# Altium PCB COMM_V3.PcbDoc (part 2 of 5)
Units mm, origin at the board's own origin, x right, y up, seen from the top; angles counter-clockwise.
Board outline 93 x 90 mm, 6 copper layers (Top Layer, L2_GND, L3_PWR, L4_SIG, L5_GND, Bottom Layer), stack 1.634 mm thick; 271 components, 237 nets, 1362 pads, 1090 vias.
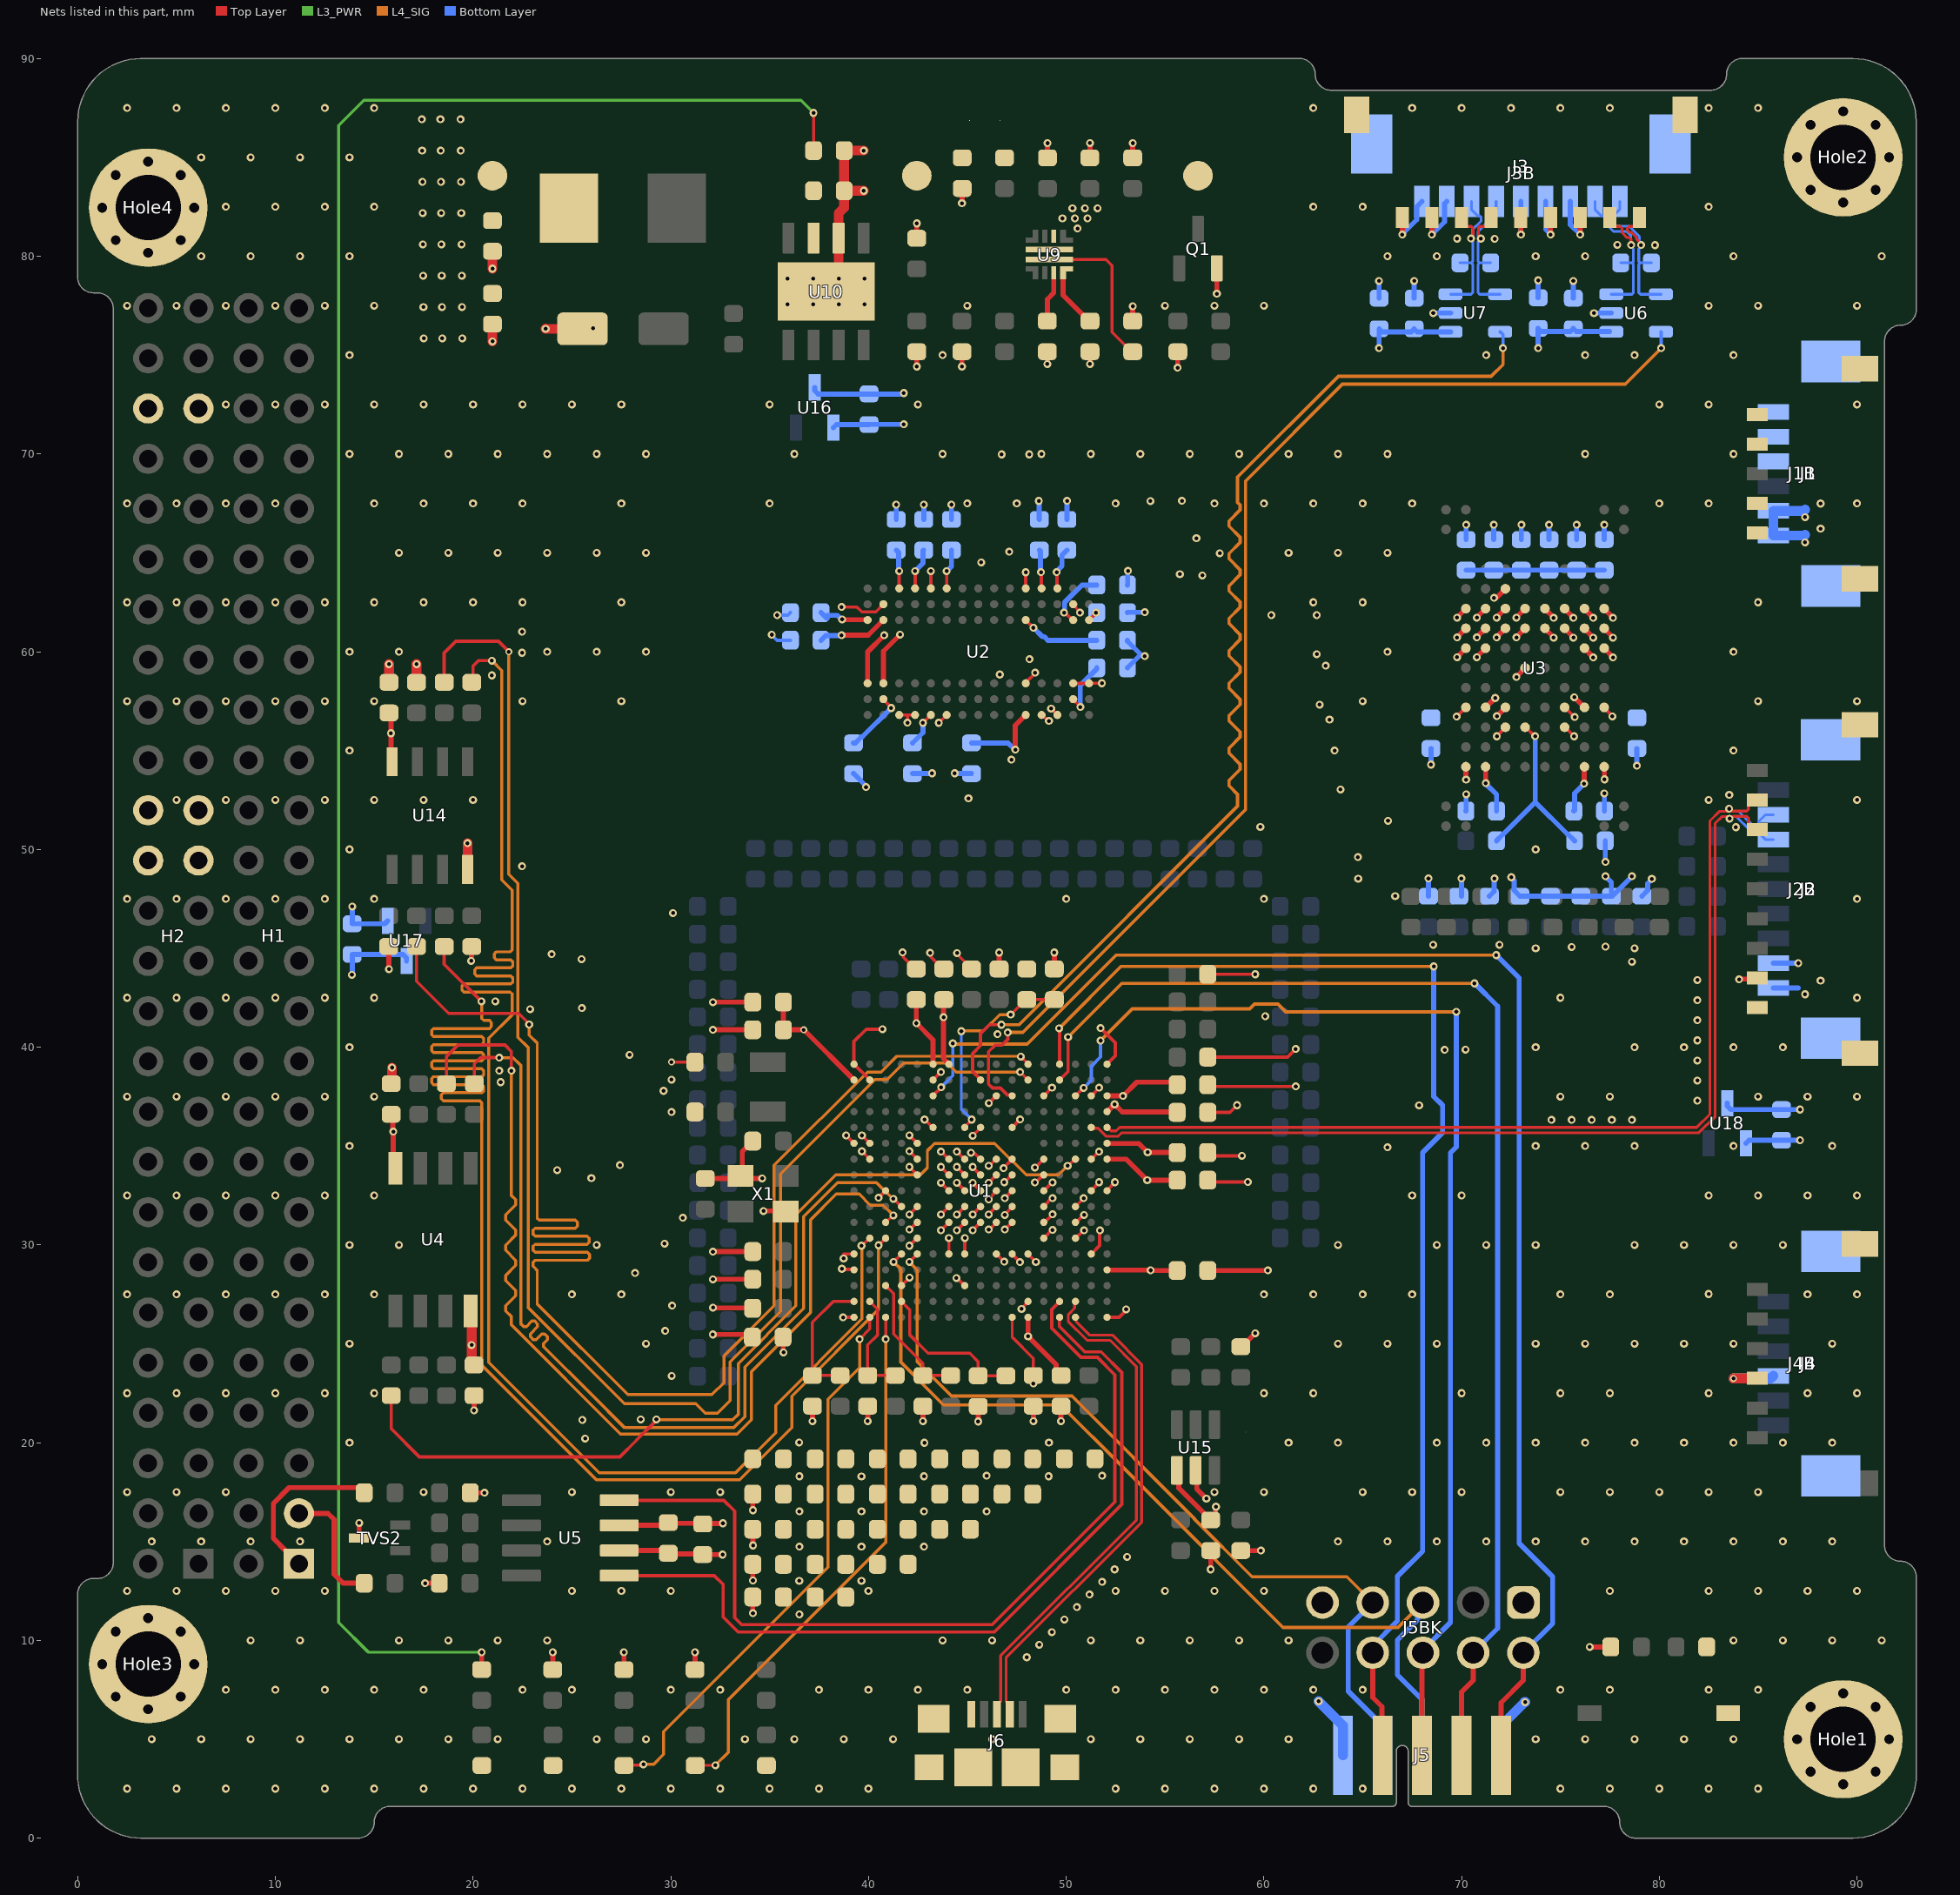
[diagram p6: the nets of this part, all layers, seen from the top]

## Via types
v1: diameter 0.4, hole 0.2, Top Layer to Bottom Layer, tented both sides, 1084 vias
v2: diameter 0.35, hole 0.2, Top Layer to Bottom Layer, tented both sides, 6 vias

## Nets (pads, with @x,y where several pads share a name; then routed paths per layer and width w, separated by ;. In a path a pad name is that pad's centre, name@x,y a point inside that pad or via, vN(x,y) a via of type N, cw(c..) or ccw(c..) an arc to the next point about the centre after c; other vN are vias at no path point)
3V3: C1.2 C2.2 C3.2 C4.2 C5.2 C6.2 C7.2 C8.2 C9.2 C10.2 C11.2 C12.2 C13.2 C14.2 C15.2 C16.2 C17.2 C18.2 C19.2 C20.2 C27.2 C28.2 C29.2 C30.2 C31.2 C32.2 C33.1 C34.1 C36.2 C37.2 C38.2 C39.2 C47.1 C49.2 C50.2 C58.2 C59.2 C60.2 C61.2 C62.2 C63.2 C64.2 C65.2 C66.2 C67.2 C68.2 C69.2 C70.1 C71.2 C72.2 C73.2 C74.2 C75.2 C76.2 C77.2 C78.2 C79.2 C80.2 C88.1 C89.1 C90.2 C91.2 C92.1 C95.2 C96.2 C97.2 C99.2 C101.2 FB2.1 J5.10 J5BK.1 L1.2 R1.2 R2.2 R3.2 R4.2 R5.2 R6.2 R7.2 R8.2 R17.2 R18.2 R22.2 R79.1 R80.1 R82.1 R84.1 R87.1 R117.2 R118.2 R121.2 R127.1 R151.2 R152.2 R153.2 TP13.1 U1.A6 U1.B1 U1.C17 U1.E6 U1.E9 U1.E11 U1.F5 U1.F17 U1.G5 U1.G13 U1.G17 U1.H5 U1.H13 U1.J13 U1.K5 U1.K13 U1.L5 U1.L13 U1.M5 U1.M13 U1.N7 U1.N8 U1.N10 U1.N11 U1.N12 U1.P17 U1.U12 U2.A7 U2.B2 U2.B7 U2.C9 U2.D9 U2.E1 U2.F9 U2.L1 U2.L7 U2.M9 U2.N9 U2.P2 U2.P7 U2.R7 U3.E4@72.215,63.181 U3.F2@70.215,62.181 U3.F3@71.215,62.181 U3.F4@72.215,62.181 U3.F5@73.215,62.181 U3.F6@74.215,62.181 U3.F7@75.215,62.181 U3.F8@76.215,62.181 U3.F9@77.215,62.181 U3.H3@71.215,60.181 U3.H8@76.215,60.181 U3.L2@70.215,57.181 U3.L4@72.215,57.181 U3.L7@75.215,57.181 U3.L9@77.215,57.181 U3.P3@71.215,54.181 U3.P8@76.215,54.181 U4.8 U5.3 U6.1 U7.1 U14.8 U15.1 U16.1 U17.1 U18.1 | length 171.7
  Top Layer w0.152: v1(45.269,35.518) 45.269,35.529 45.669,35.929 U1.E9@45.669,35.939
  Top Layer w0.169: U2.B2@40.757,57.601 40.757,57.571 41.148,57.18 v1(41.148,57.15) ; U2.C9@41.557,63.201 v1(41.557,64.073) ; v1(42.069,29.959) 42.079,29.959 42.459,30.339 U1.M5@42.469,30.339 ; v1(42.069,30.776) 42.088,30.776 42.451,31.139 U1.L5@42.469,31.139 ; v1(42.069,31.539) U1.K5@42.469,31.939 ; v1(42.069,33.939) U1.H5@42.469,33.539 ; v1(42.069,34.739) U1.G5@42.469,34.339 ; v1(42.069,35.539) U1.F5@42.469,35.139 ; U2.D9@42.357,63.201 v1(42.357,64.073) ; v1@42.757,56.402 U2.E1@43.157,56.801 ; v1(42.838,36.339) 42.853,36.339 43.253,35.939 U1.E6@43.269,35.939 ; U2.F9@43.957,63.201 v1(43.957,64.073) ; U1.N7@44.069,29.539 v1(44.069,30.345) ; U1.N8@44.869,29.539 v1@44.869,30.345 ; U1.N10@46.469,29.539 46.474,29.539 46.861,29.152 v1(46.865,29.152) ; U1.N11@47.269,29.539 47.269,29.528 47.663,29.135 v1(47.663,29.124) ; U1.E11@47.269,35.939 v1(47.674,36.343) ; U2.L7@47.957,61.601 47.957,61.599 48.343,61.213 v1(48.343,61.21) ; U1.N12@48.069,29.539 v1(48.469,29.139) ; v1(48.419,33.158) 48.454,33.158 48.834,33.539 U1.H13@48.869,33.539 ; v1(48.419,33.914) 48.431,33.914 48.857,34.339 U1.G13@48.869,34.339 ; v1(48.729,64.02) 48.743,64.007 48.743,63.215 U2.M9@48.757,63.201 ; U1.M13@48.869,30.339 49.286,30.756 v1(49.308,30.756) ; U1.L13@48.869,31.139 48.903,31.139 v1(49.308,31.544) ; U1.K13@48.869,31.939 48.869,31.956 49.255,32.343 v1@49.255,32.36 ; U1.J13@48.869,32.739 48.879,32.739 49.298,33.158 v1(49.308,33.158) ; v1(49.518,64.02) 49.537,64.001 49.537,63.221 U2.N9@49.557,63.201 ; v1(49.897,61.977) 49.939,61.977 50.314,61.601 U2.P7@50.357,61.601 ; U2.P2@50.357,57.601 50.357,57.583 50.723,57.217 v1(50.723,57.199) ; U2.R7@51.157,61.601 51.157,61.612 51.511,61.966 v1(51.511,61.977) ; R18.2@57.163,39.497 61.197,39.497 v1(61.61,39.91) ; R22.2@57.163,43.688 v1(59.563,43.688) ; v1(69.754,56.721) U3.L2@70.215,57.181 ; U3.L7@75.215,57.181 75.223,57.181 75.711,56.692 v1(75.719,56.692) ; U3.L9@77.215,57.181 77.215,57.16 77.628,56.747 v1(77.628,56.726)
  Top Layer w0.254: R151.2@15.736,45.093 15.742,45.087 15.742,43.948 v1(15.748,43.942) ; C58.2@15.748,56.904 15.847,56.805 v1(15.847,55.876) 15.847,54.5 U14.8@15.913,54.434 ; C32.2@15.86,36.603 15.945,36.518 15.945,35.745 v1(15.963,35.727) 15.963,33.969 U4.8@16.067,33.866 ; R152.2@17.145,58.454 v1@17.145,59.203 ; v1(19.906,44.367) 19.923,44.384 19.923,45.077 R153.2@19.939,45.093 ; v1(20.051,21.63) C31.2@20.051,22.379 ; R121.2@24.032,8.521 v1(24.032,9.398) ; U5.3@27.392,15.814 27.401,15.823 29.875,15.823 29.973,15.921 31.59,15.921 C34.1@31.623,15.888 31.639,15.904 32.623,15.904 v1(32.639,15.921) ; R79.1@27.63,8.521 v1(27.63,9.398) ; R80.1@31.228,8.521 v1(31.228,9.398) ; v1(32.126,25.469) 33.999,25.469 C92.1@34.131,25.338 ; v1(32.138,26.831) 32.153,26.816 34.192,26.816 FB2.1@34.207,26.802 ; C95.2@35.7,42.276 C96.2@35.7,40.879 v2(36.729,40.879) U1.B1@39.269,38.339 ; v1(38.637,60.833) 39.988,60.833 U2.B7@40.757,61.601 ; v1(38.667,61.636) 38.684,61.619 39.94,61.619 U2.A7@39.957,61.601 ; C88.1@42.418,42.405 42.419,42.404 42.419,41.213 v1(42.421,41.212) ; v1@42.424,41.215 42.424,41.208 43.269,40.363 U1.A6@43.269,39.139 ; R127.1@42.444,80.912 v1(42.444,81.661) ; R84.1@46.609,43.955 v1(46.609,44.788) ; v1(47.426,55.045) 47.426,56.271 U2.L1@47.957,56.801 ; U1.U12@48.069,26.339 48.072,26.336 v1@48.072,25.377 ; v1@48.075,25.367 49.491,23.951 49.491,23.643 C89.1@49.74,23.393 ; v1(49.048,74.549) R117.2@49.048,75.171 ; R82.1@49.403,43.955 v1(49.403,44.788) ; v1(51.207,74.549) R118.2@51.207,75.171 ; U1.P17@52.069,28.739 52.081,28.727 54.263,28.727 v1(54.275,28.715) 54.281,28.709 55.606,28.709 C80.2@55.61,28.705 ; U1.G17@52.069,34.339 53.037,34.339 v1(54.102,33.274) C91.2@55.613,33.274 ; U1.F17@52.069,35.139 52.082,35.126 53.674,35.126 v1(54.121,34.678) 54.125,34.675 55.609,34.675 C90.2@55.613,34.671 ; U1.C17@52.069,37.539 v1@52.871,37.539 ; v1(52.876,37.533) 53.577,38.233 55.48,38.233 C47.1@55.613,38.1 ; U15.1@55.599,18.604 55.701,18.502 55.701,17.699 56.963,16.437 56.963,16.433 57.307,16.089 C59.2@57.311,16.089 57.56,16.338 57.56,16.738 v1(57.578,16.756) ; v1(69.773,61.722) 69.773,61.739 U3.F2@70.215,62.181 U3.F2@70.215,62.198 ; v1(70.773,59.722) 70.773,59.739 U3.H3@71.215,60.181 U3.H3@71.215,60.198 ; v1(70.773,61.722) 70.773,61.739 U3.F3@71.215,62.181 U3.F3@71.215,62.198 ; U3.P3@71.215,54.181 71.218,54.178 71.218,53.356 v1(71.222,53.353) ; v1(71.646,62.722) 71.665,62.741 71.775,62.741 U3.E4@72.215,63.181 ; v1(71.773,61.722) 71.773,61.739 U3.F4@72.215,62.181 U3.F4@72.215,62.198 ; v1(71.786,56.737) 71.786,56.744 72.215,57.173 U3.L4@72.215,57.181 ; v1(72.773,61.722) 72.773,61.739 U3.F5@73.215,62.181 U3.F5@73.215,62.198 ; U3.F6@74.215,62.19 U3.F6@74.215,62.181 74.215,62.172 74.657,61.731 v1(74.657,61.714) ; U3.F7@75.215,62.19 U3.F7@75.215,62.181 75.215,62.172 75.657,61.731 v1(75.657,61.714) ; v1(76.2,53.327) 76.208,53.335 76.208,54.174 U3.P8@76.215,54.181 ; U3.H8@76.215,60.19 76.215,60.172 76.657,59.731 v1(76.657,59.714) ; U3.F8@76.215,62.19 76.215,62.172 76.657,61.731 v1(76.657,61.714) ; v1(76.482,9.667) R87.1@77.545,9.667 ; U3.F9@77.215,62.19 U3.F9@77.215,62.181 77.215,62.172 77.657,61.731 v1(77.657,61.714)
  Top Layer w0.5: R152.2@17.145,58.454 v1(17.145,59.367)
  Bottom Layer w0.254: v1(13.888,47.117) C101.2@13.888,46.241 15.536,46.241 U17.1@15.687,46.392 ; C8.2@37.605,60.579 37.841,60.815 38.619,60.815 v1(38.637,60.833) ; C12.2@37.605,61.976 37.896,61.684 37.896,61.84 38.422,61.84 38.627,61.636 v1(38.667,61.636) ; U16.1@38.232,71.337 38.384,71.488 C99.2@40.031,71.488 40.038,71.495 41.777,71.495 v1(41.783,71.501) ; C19.2@39.243,55.385 39.339,55.385 39.637,55.683 39.681,55.683 v1(41.148,57.15) ; C7.2@41.402,65.138 41.538,65.002 41.529,64.992 41.529,64.101 v1(41.557,64.073) ; C16.2@42.227,55.385 42.231,55.385 42.757,55.911 v1@42.757,56.345 ; v1(42.357,64.073) 42.764,64.481 42.764,65.107 C14.2@42.795,65.138 ; v1(43.957,64.073) 44.196,64.312 C20.2@44.196,65.138 ; C15.2@45.212,55.385 47.06,55.385 47.4,55.045 v1(47.426,55.045) ; v1(48.343,61.21) 48.795,60.758 48.895,60.758 49.074,60.579 C11.2@51.549,60.579 ; C18.2@48.641,65.138 48.701,65.078 48.701,64.048 v1(48.729,64.02) ; v1(49.518,64.02) 49.518,64.06 49.79,64.332 49.79,64.89 C17.2@50.038,65.138 ; v1(49.897,61.977) 49.925,62.005 49.925,62.498 50.8,63.373 C13.2@51.549,63.373 ; v1(50.723,57.199) 50.723,57.262 50.718,57.267 50.718,57.899 50.709,57.907 50.709,58.292 51.549,59.132 C10.2@51.549,59.182 ; v1(51.511,61.977) C9.2@51.518,61.977 ; C9.2@51.519,61.976 C9.2@51.549,61.976 ; v1(65.826,75.349) C36.2@65.826,76.329 65.978,76.177 67.452,76.177 C37.2@67.604,76.329 67.756,76.177 U7.1@69.444,76.177 ; R1.2@68.326,47.638 v1(68.326,48.53) ; R2.2@69.995,47.638 v1(69.995,48.53) ; C6.2@70.231,64.122 C5.2@71.628,64.122 C29.2@73.025,64.122 C30.2@74.422,64.122 C28.2@75.819,64.122 C1.2@77.216,64.122 ; v1(71.222,53.353) 71.222,53.327 71.768,52.781 C3.2@71.768,51.943 ; R3.2@71.41,47.638 71.645,47.873 71.645,48.511 v1(71.664,48.53) ; v1(72.518,48.593) 72.518,48.567 72.657,48.427 72.657,47.929 72.949,47.638 R4.2@72.952,47.638 R5.2@74.495,47.638 R6.2@76.037,47.638 R7.2@77.579,47.638 ; v1(73.874,75.349) C38.2@73.874,76.352 74.026,76.2 75.5,76.2 75.652,76.352 75.804,76.2 U6.1@77.492,76.2 ; C27.2@75.679,51.943 75.715,51.979 75.715,52.842 v1(76.2,53.327) ; R17.2@77.265,50.433 77.272,50.426 77.272,49.374 v1(77.279,49.367) ; v1(77.279,48.641) 77.579,48.342 R7.2@77.579,47.638 ; v1(78.613,48.641) 78.613,48.632 77.619,47.638 R7.2@77.579,47.638 ; R8.2@79.121,47.638 79.125,47.638 79.416,47.929 79.416,48.275 79.624,48.483 v1(79.624,48.514) ; U18.1@84.389,35.142 84.54,35.293 C97.2@86.188,35.293 v1(87.122,35.293)
  Bottom Layer w0.5: J5.10@72,4.186 72,5.686 73.184,6.871 v1(73.214,6.871)
  other v1: 36.506,11.311 36.501,13.008 36.506,14.74 42.81,14.74 36.506,16.518 42.81,16.518 36.506,18.296 42.81,18.296 49.115,18.296 42.828,19.992 49.131,20.001 36.497,20.011 48.075,25.374 44.874,30.345 49.308,32.36 42.756,56.402 17.505,75.851 18.441,75.851 19.457,75.851 17.492,77.433 18.428,77.433 19.444,77.433 17.478,79.015 18.415,79.015 19.431,79.015 17.465,80.597 18.401,80.597 19.417,80.597 17.452,82.18 18.388,82.18 19.404,82.18 17.438,83.762 18.375,83.762 19.391,83.762 17.425,85.344 18.361,85.344 19.377,85.344 17.412,86.926 18.348,86.926 19.364,86.926
12V: C40.2 C45.2 C48.2 R119.2 SB1.2 TP1.1 U9.6 U10.7 | length 111.2
  Top Layer w0.152: C45.2@37.224,85.344 v1(37.224,87.249)
  Top Layer w0.254: R119.2@20.435,8.521 v1(20.435,9.398)
  L3_PWR w0.152: v1(20.435,9.398) 14.708,9.398 13.208,10.898 13.208,86.614 14.478,87.884 36.589,87.884 v1(37.224,87.249)
12V_CONN: C41.2 J1.1 J1.2 J1B.5 J1B.6 J2.1 J2B.9 R123.1 SB1.1 TP12.1 U9.5 | length 13.9
  Top Layer w0.152: U9.5@49.147,79.839 52.015,79.839 52.324,79.529 52.324,76.163 53.316,75.171 C41.2@53.366,75.171
  Bottom Layer w0.254: J2B.9@85.77,43 85.773,42.997 87.032,42.997
  Bottom Layer w0.5: 87.376,65.913 87.338,65.875 J1B.6@85.773,65.875 J1B.5@85.773,67.125 87.318,67.125 87.376,67.183
  other v1: 87.376,42.674 88.158,43.364 87.376,65.532 88.158,66.222 87.376,66.802 88.158,67.492
ADC_ILM: C21.2 R85.2 U1.T4 | length 8
  Top Layer w0.152: U1.T4@41.669,27.139 42.079,26.729 42.079,25.459 43.012,24.526 45.121,24.526 45.551,24.096 45.551,23.393 45.564,23.381 R85.2@46.948,23.381
ADC_TEMP_1: C98.2 R163.2 U1.T1 | length 6.6
  Top Layer w0.152: R163.2@38.566,23.393 C98.2@37.169,23.393 37.169,26.081 38.227,27.139 U1.T1@39.269,27.139
ADC_TEMP_2: C100.2 R164.2 U1.T2 | length 5.5
  Top Layer w0.152: U1.T2@40.069,27.139 40.455,26.753 40.455,25.435 39.963,24.944 C100.2@39.963,23.393 R164.2@41.354,23.393
ADC_TEMP_3: C103.2 R165.2 U1.R3 | length 6.7
  Top Layer w0.152: U1.R3@40.869,27.939 41.271,27.537 41.271,25.497 42.757,24.01 C103.2@42.757,23.393 R165.2@44.154,23.393
AUXOFF: R117.1 U9.3 | length 2.6
  Top Layer w0.254: R117.1@49.048,76.721 49.048,77.828 49.372,78.152 U9.3@49.372,79.163
BOOT0: R82.2 R83.1 U1.E8 | length 10.7
  Top Layer w0.152: U1.E8@44.869,35.939 44.869,35.962 45.222,36.316 v1(45.222,36.339) ; v1(47.192,41.65) 47.196,41.65 47.951,42.405 R83.1@48.006,42.405 ; R83.1@47.956,42.405 R82.2@49.403,42.405
  L4_SIG w0.152: v1(44.695,40.805) 44.711,40.821 45.807,40.821 46.635,41.65 v1(47.192,41.65)
  Bottom Layer w0.152: v1(44.695,40.805) 44.695,36.866 v1(45.222,36.339)
CAN0_H: H1.03 R143.2 | length 6.4
  Top Layer w0.254: H1.03@11.19,16.42 12.663,16.42 12.968,16.115 12.968,13.349 13.424,12.893 R143.2@14.497,12.893
CAN0_L: H1.01 R142.2 | length 8.6
  Top Layer w0.254: H1.01@11.18,13.88 11.18,13.89 10.552,14.518 10.542,14.518 9.896,15.164 9.896,16.925 10.693,17.722 14.24,17.722 R142.2@14.497,17.465
CAN_RX: U1.T14 U5.4 | length 45.5
  Top Layer w0.169: U5.4@27.392,17.084 32.683,17.084 33.23,16.536 33.23,11.148 33.582,10.796 46.264,10.796 52.469,17.001 52.469,23.425 51.577,24.318 50.739,24.318 49.269,25.788 49.269,26.739 U1.T14@49.669,27.139
CAN_TX: U1.U14 U5.1 | length 41.5
  Top Layer w0.169: U5.1@27.392,13.274 32.202,13.274 32.649,12.826 32.649,11.177 33.403,10.423 46.363,10.423 52.821,16.881 52.821,18.021 52.821,23.538 51.77,24.589 50.94,24.589 49.656,25.873 49.656,26.326 U1.U14@49.669,26.339
COMM_USB_FS_N: J6.2 U1.U15 | length 25.1
  Top Layer w0.141: J6.2@47.15,6.257 47.15,6.732 46.959,6.923 46.959,9.115 53.816,15.972 53.816,23.957 52.334,25.439 51.169,25.439 50.509,26.1 50.509,26.3 U1.U15@50.469,26.339
COMM_USB_FS_P: J6.3 U1.T15 | length 26.1
  Top Layer w0.141: J6.3@46.5,6.257 46.5,6.732 46.691,6.923 46.691,9.226 53.548,16.083 53.548,23.846 52.222,25.171 51.058,25.171 50.112,26.117 50.112,26.487 50.425,26.8 50.425,27.095 U1.T15@50.469,27.139
DEBUG_UART_RX: J5.8 J5BK.5 U1.N4 | length 47
  Top Layer w0.169: v1(41.269,29.139) U1.N4@41.669,29.539
  L4_SIG w0.169: v1(41.269,29.139) 41.631,28.777 41.631,24.079 43.807,21.903 49.726,21.903 52.855,18.773 52.855,18.77 60.968,10.657 66.791,10.657 J5BK.5@68.047,11.913
  Bottom Layer w0.254: J5.8@68,4.186 68,7.012 66.757,8.255 66.757,10.018 67.779,11.041 67.779,11.645 J5BK.5@68.047,11.913
DEBUG_UART_TX: J5.7 J5BK.7 U1.N5 | length 42.8
  Top Layer w0.169: v1(42.069,29.139) U1.N5@42.469,29.539
  L4_SIG w0.169: v1(42.069,29.139) 42.069,29.137 42.463,28.743 42.463,24.091 44.202,22.352 50.295,22.352 56.495,16.152 56.495,16.124 59.402,13.218 64.201,13.218 J5BK.7@65.507,11.913
  Bottom Layer w0.254: J5BK.7@65.507,11.913 64.262,10.668 64.262,7.424 66,5.686 J5.7@66,4.186
eMMC_RSTn: R17.1 R19.1 U3.M5@73.215,56.181 | length 9.6
  Top Layer w0.169: U3.M5@73.215,56.181 73.241,56.181 73.693,55.729 v1(73.719,55.729)
  Bottom Layer w0.254: R19.1@71.768,50.433 71.768,50.437 72.112,50.781 72.116,50.781 73.729,52.394 ; v1(73.719,55.729) 73.729,55.72 73.729,52.394 ; R17.1@75.715,50.433 75.715,50.437 75.371,50.781 75.342,50.781 73.729,52.394
EXP_USB_FS_N: J2.8 J2B.2 U1.E17 | length 51.4
  Top Layer w0.141: U1.E17@52.069,35.939 52.092,35.939 52.266,35.764 52.529,35.764 52.704,35.939 81.89,35.939 82.56,36.61 82.56,51.443 83.046,51.929 v1@83.409,51.929 ; v1(83.53,52.058) 83.6,52.058 83.717,51.942 84.425,51.942 84.508,52.025 84.508,52.24 84.767,52.5 J2.8@84.958,52.5
  Bottom Layer w0.141: v1(83.53,52.058) 83.575,52.058 83.707,51.927 84.014,51.927 84.681,51.259 84.957,51.259 85.04,51.342 85.04,51.421 85.37,51.75 J2B.2@85.77,51.75
EXP_USB_FS_P: J2.7 J2B.3 U1.E16 | length 52.4
  Top Layer w0.141: U1.E16@51.269,35.939 51.313,35.895 51.608,35.895 52.007,35.496 52.64,35.496 52.815,35.671 82.001,35.671 82.829,36.499 82.829,51.332 83.157,51.66 v1@83.409,51.66 ; v1(83.556,51.557) 83.626,51.557 83.742,51.674 84.425,51.674 84.508,51.591 84.508,51.26 84.767,51 J2.7@84.958,51
  Bottom Layer w0.141: v1(83.556,51.557) 83.604,51.557 83.705,51.659 83.902,51.659 84.57,50.991 84.957,50.991 85.04,50.908 85.04,50.829 85.37,50.5 J2B.3@85.77,50.5
FLT#: R118.1 U9.4 | length 3
  Top Layer w0.254: U9.4@49.847,79.163 49.847,78.031 51.157,76.721 R118.1@51.207,76.721
FRAM_CS: R154.1 U1.A12 | length 76.6
  Top Layer w0.152: R154.1@17.145,45.093 17.145,43.332 18.771,41.707 22.301,41.707 22.837,41.171 v1(22.837,41.147) ; v1(47.708,39.519) 47.708,39.51 48.069,39.149 U1.A12@48.069,39.139
  L4_SIG w0.152: v1(22.837,41.147) 22.837,40.613 23.244,40.206 23.244,32.427 23.244,31.352 23.346,31.25 25.17,31.25 25.271,31.149 25.271,30.946 25.17,30.844 23.139,30.844 23.037,30.743 23.037,30.54 23.139,30.438 25.771,30.438 25.872,30.337 25.872,30.134 25.771,30.032 23.139,30.032 23.037,29.931 23.037,29.728 23.139,29.626 25.785,29.626 25.886,29.525 25.886,29.322 25.785,29.22 23.139,29.22 23.037,29.119 23.037,28.916 23.139,28.814 23.143,28.814 23.244,28.713 23.244,28.637 23.244,27.004 27.823,22.425 32.081,22.425 32.685,23.03 32.685,24.381 35.231,26.926 35.231,34.022 39.948,38.739 40.633,38.739 41.433,39.539 47.689,39.539 v1(47.708,39.519)
FRAM_SPI2_MISO: R157.1 U1.M3 | length 77.6
  Top Layer w0.152: v1(40.514,29.979) 40.514,29.982 U1.M3@40.869,30.339 U1.M3@40.869,30.339
  Top Layer w0.169: R157.1@18.577,45.058 R157.1@18.542,45.093 18.542,44.196 v1(20.422,42.316)
  L4_SIG w0.152: v1(20.422,42.316) 20.444,42.294 20.444,41.525 20.444,41.449 20.545,41.347 20.828,41.347 20.929,41.246 20.929,41.043 20.828,40.941 18.005,40.941 17.904,40.84 17.904,40.637 18.005,40.535 20.437,40.535 20.539,40.434 20.539,40.231 20.437,40.129 18.005,40.129 17.904,40.028 17.904,39.825 18.005,39.723 20.437,39.723 20.539,39.622 20.539,39.419 20.437,39.317 18.005,39.317 17.904,39.216 17.904,39.013 18.005,38.911 20.437,38.911 20.539,38.81 20.539,38.607 20.437,38.505 18.005,38.505 17.904,38.404 17.904,38.201 18.005,38.099 20.437,38.099 20.539,37.998 20.539,37.795 20.437,37.693 18.498,37.693 18.397,37.592 18.397,37.389 18.498,37.287 20.342,37.287 20.444,37.186 20.444,36.173 20.444,34.107 20.444,28.317 20.444,23.918 26.237,18.125 33.487,18.125 36.124,20.762 36.124,22.347 40.514,26.737 v1(40.514,29.979)
FRAM_SPI2_MOSI: R156.1 U1.M2 | length 78
  Top Layer w0.152: v1(39.648,29.959) 39.67,29.959 40.05,30.339 U1.M2@40.069,30.339
  Top Layer w0.169: R156.1@19.939,58.454 20,58.454 20,59.268 20.279,59.547 v1(20.955,59.547)
  L4_SIG w0.152: v1(20.955,59.547) 21.459,59.043 21.459,48.458 21.978,47.939 21.978,47.1 21.978,44.921 21.877,44.82 21.176,44.82 21.074,44.718 21.074,44.515 21.176,44.414 21.911,44.414 22.013,44.312 22.013,44.109 21.911,44.008 20.182,44.008 20.081,43.906 20.081,43.703 20.182,43.602 21.911,43.602 22.013,43.5 22.013,43.297 21.911,43.196 19.54,43.196 19.438,43.094 19.438,42.891 19.54,42.79 21.877,42.79 21.978,42.688 21.978,42.612 21.978,41.632 20.792,40.446 20.792,24.067 26.388,18.471 33.276,18.471 35.306,20.502 35.306,21.889 39.673,26.255 39.673,29.934 v1(39.648,29.959)
FRAM_SPI2_SCK: R155.1 U1.B12 | length 79.2
  Top Layer w0.152: v1(47.674,38.741) 47.674,38.737 48.069,38.343 U1.B12@48.069,38.339
  Top Layer w0.169: R155.1@18.542,58.454 18.542,59.933 19.137,60.528 21.28,60.528 v2(21.808,60)
  L4_SIG w0.152: v2(21.808,60) 21.803,59.995 21.803,48.742 22.267,48.278 22.267,40.506 22.784,39.989 22.784,26.839 27.652,21.971 31.258,21.971 31.741,21.488 32.372,21.488 33.01,22.126 33.01,24.081 35.56,26.631 35.56,33.588 40.326,38.354 40.94,38.354 41.786,39.2 43.985,39.2 44.448,38.738 47.671,38.738 v1(47.674,38.741)
GND: BT1.1 C1.1 C2.1 C3.1 C4.1 C5.1 C6.1 C7.1 C8.1 C9.1 C10.1 C11.1 C12.1 C13.1 C14.1 C15.1 C16.1 C17.1 C18.1 C19.1 C20.1 C21.1 C22.1 C23.1 C24.1 C25.1 C26.1 C27.1 C28.1 C29.1 C30.1 C31.1 C32.1 C33.2 C34.2 C35.2 C36.1 C37.1 C38.1 C39.1 C40.1 C41.1 C42.1 C43.1 C45.1 C46.1 C47.2 C48.1 C49.1 C50.1 C58.1 C59.1 C60.1 C61.1 C62.1 C63.1 C64.1 C65.1 C66.1 C67.1 C68.1 C69.1 C70.2 C71.1 C72.1 C73.1 C74.1 C75.1 C76.1 C77.1 C78.1 C79.1 C80.1 C86.1 C87.1 C88.2 C89.2 C90.1 C91.1 C92.2 C93.1 C94.1 C95.1 C96.1 C97.1 C98.1 C99.1 C100.1 C101.1 C103.1 D1.1 H2.29 H2.30 H2.31 H2.32 H2.47 H2.48 Hole1.1 Hole2.1 Hole3.1 Hole4.1 J1.4 J1.5 J1.6 J1B.1 J1B.2 J1B.3 J1B.S1 J1B.S2 J2.2 J2.10 J2B.8 J2B.S1 J2B.S2 J3.5 J3.10 J3B.5 J3B.S1 J3B.S2 J4.3 J4.7 J4B.4 J4B.S1 J4B.S2 J5.6 J5BK.9 J6.5 J6.SH1 J6.SH2 J6.SH3 J6.SH4 J6.SH5 J6.SH6 LED3.2 LED4.2 LED5.2 Q1.2 R83.2 R86.2 R91.1 R116.1 R125.2 R126.2 R128.2 R161.1 R162.1 TVS2.3 U1.A1 U1.A17 U1.B2 U1.B6 U1.C10 U1.C13 U1.C16 U1.F1 U1.F2 U1.G2 U1.G7 U1.G8 U1.G9 U1.G10 U1.G11 U1.G16 U1.H7 U1.H8 U1.H9 U1.H10 U1.H11 U1.J3 U1.J7 U1.J8 U1.J9 U1.J10 U1.J11 U1.J16 U1.J17 U1.K7 U1.K8 U1.K9 U1.K10 U1.K11 U1.K15 U1.L7 U1.L8 U1.L9 U1.L10 U1.L11 U1.L15 U1.M15 U1.N1 U1.N16 U1.P1 U1.R4 U1.R8 U1.T12 U1.U1 U1.U17 U2.A3 U2.B3 U2.B8 U2.C1 U2.D1 U2.E9 U2.F1 U2.L3 U2.L9 U2.M1 U2.N1 U2.P3 U2.P8 U2.R3 U3.G2@70.215,61.181 U3.G3@71.215,61.181 U3.G4@72.215,61.181 U3.G5@73.215,61.181 U3.G6@74.215,61.181 U3.G7@75.215,61.181 U3.G8@76.215,61.181 U3.G9@77.215,61.181 U3.H2@70.215,60.181 U3.H9@77.215,60.181 U3.J5@73.215,59.181 U3.L3@71.215,57.181 U3.L8@76.215,57.181 U3.M4@72.215,56.181 U3.M7@75.215,56.181 U3.P2@70.215,54.181 U3.P9@77.215,54.181 U4.4 U5.2 U6.2 U7.2 U9.8 U10.6 U10.9 U14.4 U15.2 U16.3 U17.3 U18.3 X1.2 X1.4 | length 188.5
  Top Layer w0.152: v2(30.035,39.245) C25.1@31.225,39.245 ; v1(38.637,62.264) 39.416,62.264 39.662,62.019 40.374,62.019 U2.B8@40.757,62.401 ; U2.C1@41.557,56.801 41.987,56.801 ; v1(41.976,56.408) 41.974,56.41 41.974,56.788 41.987,56.801 ; U2.D1@42.357,56.801 41.987,56.801 ; v1(44.481,44.76) 44.481,44.707 45.212,43.976 R86.2@45.212,43.955 ; U2.P8@50.357,62.401 50.357,62.359 50.697,62.019 v1(50.697,61.977) ; C47.2@57.163,38.1 57.249,38.014 v1(61.614,38.014)
  Top Layer w0.169: v1(38.658,28.791) 38.684,28.765 39.243,28.765 U1.P1@39.269,28.739 ; v1(38.716,26.332) 38.719,26.336 39.266,26.336 U1.U1@39.269,26.339 ; v1(38.745,29.317) 38.746,29.539 U1.N1@39.269,29.539 ; v1(38.87,35.535) 38.873,35.535 U1.F1@39.269,35.139 U1.F1@39.271,35.139 ; U1.A1@39.269,39.139 U1.B2@40.069,38.339 ; U1.A1@39.269,39.143 39.269,40.289 39.886,40.905 v1(40.709,40.905) ; v1(39.669,34.732) 39.673,34.732 40.065,34.339 U1.G2@40.069,34.339 ; v1(39.668,35.535) 39.67,35.535 40.067,35.139 U1.F2@40.069,35.139 ; v1(40.513,32.385) U1.J3@40.869,32.739 ; U1.R4@41.669,27.939 v1@42.077,28.347 ; v1(41.726,44.793) 41.76,44.759 41.76,44.563 42.368,43.955 C88.2@42.418,43.955 ; v1(43.116,44.773) 43.151,44.739 43.151,44.569 43.765,43.955 C87.1@43.815,43.955 ; U2.E9@43.157,63.201 v1(43.157,64.073) ; U1.B6@43.269,38.339 v1(43.669,38.741) ; v1@43.557,56.402 U2.F1@43.957,56.801 ; v1(43.669,30.739) U1.L7@44.069,31.139 ; v1(43.669,31.539) U1.K7@44.069,31.939 ; v1(43.669,33.139) U1.J7@44.069,32.739 ; v1(43.669,33.939) U1.H7@44.069,33.539 ; v1(43.669,34.715) 43.681,34.715 44.057,34.339 U1.G7@44.069,34.339 ; v1(44.451,28.323) 44.468,28.323 44.852,27.939 U1.R8@44.869,27.939 ; v1(44.469,30.739) U1.L8@44.869,31.139 ; v1(44.469,31.539) U1.K8@44.869,31.939 ; v1(44.469,33.139) U1.J8@44.869,32.739 ; v1(44.469,33.939) U1.H8@44.869,33.539 ; v1(44.469,34.715) 44.481,34.715 44.857,34.339 U1.G8@44.869,34.339 ; v1(45.188,34.658) 45.222,34.623 45.385,34.623 U1.G9@45.669,34.339 ; v1(45.269,30.739) U1.L9@45.669,31.139 ; v1(45.269,31.539) U1.K9@45.669,31.939 ; v1(45.269,33.139) U1.J9@45.669,32.739 ; v1(45.269,33.939) U1.H9@45.669,33.539 ; v1(46.082,32.302) 46.082,32.327 46.469,32.714 U1.J10@46.469,32.739 ; v1(46.082,33.139) 46.082,33.145 46.469,33.532 U1.H10@46.469,33.539 U1.H10@46.466,33.536 ; v1(46.082,34) 46.106,34 46.445,34.339 U1.G10@46.469,34.339 ; v1(46.084,37.166) 46.09,37.166 46.463,37.539 U1.C10@46.469,37.539 ; v1@46.133,30.776 46.133,30.789 46.469,31.125 U1.L10@46.469,31.139 ; v1@46.133,31.538 46.168,31.573 46.168,31.638 U1.K10@46.469,31.939 ; v1(46.837,33.881) 46.837,33.894 47.269,34.326 U1.G11@47.269,34.339 ; v1(46.869,33.169) 46.884,33.169 47.254,33.539 U1.H11@47.269,33.539 ; v1(46.895,30.776) 46.901,30.776 47.264,31.139 U1.L11@47.269,31.139 ; v1(46.895,31.518) 46.895,31.541 47.269,31.915 U1.K11@47.269,31.939 ; v1(46.895,32.36) 46.895,32.363 47.269,32.737 U1.J11@47.269,32.739 ; v1(47.742,26.764) 47.742,26.788 48.069,27.115 U1.T12@48.069,27.139 ; U2.L3@47.957,58.401 47.957,58.434 48.427,58.905 v1(48.427,58.937) ; U2.L9@47.957,63.201 v1(47.957,64.014) ; U2.M1@48.757,56.801 48.792,56.801 49.092,56.501 v1(49.128,56.501) ; U1.C13@48.869,37.539 48.872,37.539 49.281,37.949 v1(49.284,37.949) ; v1(49.24,57.123) 49.24,57.121 49.557,56.804 U2.N1@49.557,56.801 ; U2.P3@50.357,58.401 U2.R3@51.157,58.401 51.16,58.404 51.804,58.404 v1(51.807,58.407) ; U1.M15@50.469,30.339 50.489,30.339 50.887,30.737 v1(50.907,30.737) ; U1.L15@50.469,31.139 50.499,31.139 50.878,31.518 v1(50.907,31.518) ; U1.K15@50.469,31.939 v1@50.887,32.357 ; U1.N16@51.269,29.539 51.698,29.968 51.698,30.723 v1(51.712,30.737) ; U1.J16@51.269,32.739 51.269,32.754 51.669,33.154 v1(51.669,33.169) ; U1.G16@51.269,34.339 51.282,34.339 51.656,34.713 v1(51.669,34.713) ; U1.C16@51.269,37.539 51.269,37.544 51.669,37.944 v1(51.669,37.949) ; v1(51.742,40.968) 52.484,40.225 52.484,39.554 U1.A17@52.069,39.139 ; U1.U17@52.069,26.339 U1.U17@52.069,26.339 52.685,26.341 53.034,26.69 v1(53.034,26.739) ; U1.J17@52.069,32.739 52.069,32.754 52.469,33.154 v1(52.469,33.169) ; C91.1@57.163,33.274 57.256,33.181 v1(59.189,33.181) ; C90.1@57.163,34.671 57.326,34.508 v1(58.89,34.508) ; C86.1@57.163,36.703 58.284,36.703 v1(58.644,37.063) ; v1(71.786,55.722) 71.786,55.737 72.215,56.166 U3.M4@72.215,56.181 ; U3.J5@73.215,59.181 U3.J5@73.215,59.198 ; U3.M7@75.215,56.181 75.23,56.181 v1(75.689,55.722)
  Top Layer w0.254: TVS2.3@14.228,15.179 14.24,15.19 v1(14.24,15.941) ; v1(17.572,12.893) R116.1@18.292,12.893 ; C35.2@19.855,17.465 v1(20.574,17.465) ; U5.2@27.392,14.544 29.875,14.544 30.048,14.371 31.59,14.371 C34.2@31.623,14.338 v1(32.623,14.338) ; C23.1@31.75,33.358 33.396,33.358 X1.4@33.521,33.483 ; v1(32.133,28.261) v1(32.133,28.261) 34.151,28.263 C94.1@34.153,28.261 ; v1(32.133,29.658) v1(32.133,29.658) 34.151,29.66 C93.1@34.153,29.658 ; v1(32.133,40.876) C96.1@34.151,40.877 ; v1(32.133,42.273) C95.1@34.151,42.274 ; C63.1@34.144,12.198 C63.1@34.15,12.192 34.15,11.383 v1(34.156,11.376) ; C69.1@34.144,13.849 C69.1@34.15,13.843 34.15,13.034 v1(34.156,13.027) ; C66.1@34.144,17.405 C66.1@34.15,17.399 34.15,16.59 v1(34.156,16.583) ; C67.1@34.15,15.621 34.156,15.615 34.156,14.805 v1(34.163,14.799) ; C22.1@34.15,35.25 34.15,35.246 33.859,34.955 33.855,34.955 33.621,34.721 33.621,33.583 X1.4@33.521,33.483 ; v1(34.628,33.362) 33.642,33.362 X1.4@33.521,33.483 ; v1(34.689,31.715) 35.789,31.715 X1.2@35.821,31.683 ; C92.2@35.681,25.338 35.69,25.329 35.69,24.574 v1(35.699,24.565) ; v1(37.169,21.082) C98.1@37.169,21.843 ; U2.A3@39.957,58.401 39.957,59.989 v1(40.801,60.833) ; v1(39.963,21.082) C100.1@39.963,21.843 ; U2.B3@40.757,58.401 40.757,60.023 v1(41.597,60.864) ; v1(42.444,74.422) R128.2@42.444,75.171 ; v1(42.757,21.082) C103.1@42.757,21.843 ; v1(44.73,74.422) R125.2@44.73,75.171 ; v1(44.73,82.677) 44.736,82.683 44.736,83.42 C40.1@44.743,83.426 ; v1(45.551,21.07) C21.1@45.551,21.831 ; v1(48.343,21.082) C46.1@48.343,21.843 ; C42.1@49.05,84.971 C42.1@49.054,84.976 49.054,85.716 v1(49.059,85.72) ; v1(49.74,21.082) C89.2@49.74,21.843 ; R126.2@51.198,84.976 51.202,84.981 51.202,85.72 v1(51.207,85.725) ; C43.1@53.361,84.971 C43.1@53.366,84.976 53.366,85.716 v1(53.371,85.72) ; C41.1@53.366,76.721 v1(53.366,77.47) ; v1(55.633,74.362) 55.643,74.371 55.643,75.162 R91.1@55.652,75.171 ; U15.2@56.549,18.604 56.607,18.546 56.607,17.654 v1(57.092,17.169) ; C80.1@57.163,28.702 v1@60.198,28.702 ; v1(57.311,13.589) C59.1@57.311,14.539 ; Q1.2@57.618,79.391 57.62,79.389 57.62,78.104 v1(57.622,78.102) ; R162.1@58.835,14.539 v1(59.847,14.539) ; R161.1@58.835,24.852 58.887,24.852 59.562,25.527 v1(59.563,25.527) ; v1(69.773,59.722) 69.773,59.731 70.215,60.172 U3.H2@70.215,60.181 U3.H2@70.215,60.198 ; v1(69.773,60.722) 69.773,60.739 U3.G2@70.215,61.181 U3.G2@70.215,61.198 ; U3.P2@70.215,54.181 70.222,54.174 70.222,53.538 v1(70.229,53.531) ; v1(70.773,60.722) 70.773,60.739 U3.G3@71.215,61.181 U3.G3@71.215,61.198 ; U3.L3@71.215,57.181 71.222,57.181 71.698,57.657 v1(71.704,57.657) ; v1(71.773,60.722) 71.773,60.739 U3.G4@72.215,61.181 U3.G4@72.215,61.198 ; v1(72.773,58.722) 72.773,58.731 73.215,59.172 U3.J5@73.215,59.181 ; v1(72.773,60.722) 72.773,60.739 U3.G5@73.215,61.181 U3.G5@73.215,61.198 ; v1(73,81.098) J3.5@73,81.958 ; U3.G6@74.215,61.19 U3.G6@74.215,61.181 74.215,61.172 74.657,60.731 v1(74.657,60.714) ; U3.G7@75.215,61.19 U3.G7@75.215,61.181 75.215,61.172 75.657,60.731 v1(75.657,60.714) ; v1@75.704,57.692 U3.L8@76.215,57.181 ; U3.G8@76.215,61.19 76.215,61.172 76.657,60.731 v1(76.657,60.714) ; U3.P9@77.215,54.181 77.222,54.174 77.222,53.549 v1(77.228,53.542) ; U3.H9@77.215,60.19 U3.H9@77.215,60.181 77.215,60.172 77.657,59.731 v1(77.657,59.714) ; U3.G9@77.215,61.19 U3.G9@77.215,61.181 77.215,61.172 77.657,60.731 v1(77.657,60.714) ; v1(84.037,43.425) 84.055,43.444 84.902,43.444 J2.2@84.958,43.5
  Top Layer w0.5: C58.1@15.748,58.454 v1(15.748,59.367) ; C32.1@15.86,38.153 15.897,38.19 v1(15.897,38.968) ; U14.4@19.723,48.986 v1(19.723,50.313) ; U4.4@19.877,26.666 19.928,26.615 v1(19.928,24.932) 19.928,24.052 C31.1@20.051,23.929 ; v1(20.981,75.692) C49.1@20.981,76.568 ; v1(20.981,79.375) C50.1@20.981,80.251 ; v1(23.672,76.332) 23.677,76.327 D1.1@25.535,76.327 ; U10.6@38.507,78.867 38.492,78.882 38.492,82.177 38.774,82.459 C48.1@38.774,83.312 ; C45.1@38.774,85.294 C48.1@38.774,83.312 ; C45.1@38.774,85.344 v1(39.762,85.344) ; v1(39.762,83.312) C48.1@38.774,83.312 ; v2(83.75,23.241) 83.759,23.25 J4.3@84.958,23.25
  Bottom Layer w0.169: v1(35.104,60.859) 35.104,60.851 35.377,60.579 C8.1@36.055,60.579 ; v1(35.381,61.849) 35.928,61.849 C12.1@36.055,61.976
  Bottom Layer w0.254: v1(13.872,43.659) 13.888,43.675 C101.1@13.888,44.691 16.459,44.691 16.637,44.513 U17.3@16.637,44.362 ; U16.3@37.282,73.367 37.282,73.209 37.46,73.031 41.709,73.031 41.757,73.08 v1(41.783,73.08) ; C19.1@39.243,53.835 39.247,53.835 39.86,53.222 39.86,53.175 v1(39.878,53.157) ; C7.1@41.402,66.688 v1(41.402,67.437) ; C16.1@42.227,53.835 42.236,53.844 43.204,53.844 v1(43.213,53.853) ; C14.1@42.799,66.688 v1(42.799,67.437) ; C20.1@44.196,66.688 v1(44.196,67.437) ; v1(44.357,53.853) 44.366,53.844 45.203,53.844 C15.1@45.212,53.835 ; v1(48.62,67.626) 48.631,67.615 48.631,66.698 C18.1@48.641,66.688 ; C17.1@50.038,66.688 50.043,66.693 50.043,67.622 v1(50.048,67.627) ; C10.1@53.099,59.182 53.099,59.186 53.712,59.799 ; C11.1@53.099,60.579 53.099,60.529 53.828,59.8 53.947,59.8 v1(53.975,59.772) ; C9.1@53.099,61.976 53.112,61.989 53.962,61.989 v1(53.975,62.002) ; C13.1@53.099,63.373 53.113,63.387 53.113,64.074 v1(53.126,64.088) ; C36.1@65.826,77.879 v1(65.826,78.755) ; C37.1@67.604,77.879 v1(67.604,78.755) ; v1(68.453,54.292) C2.1@68.453,55.105 ; v1(68.568,77.127) U7.2@69.444,77.127 ; C3.1@70.218,51.943 70.224,51.949 70.224,52.784 v1(70.231,52.79) ; C6.1@70.231,65.672 v1(70.231,66.421) ; C5.1@71.628,65.672 v1(71.628,66.421) ; v1(73,81.098) J3B.5@73,82.773 ; C29.1@73.025,65.672 v1(73.025,66.421) ; C38.1@73.874,77.902 v1(73.874,78.778) ; C30.1@74.422,65.672 v1(74.422,66.421) ; C39.1@75.652,77.879 v1(75.652,78.755) ; C28.1@75.819,65.672 v1(75.819,66.421) ; v1(76.696,77.127) U6.2@77.572,77.127 ; C1.1@77.216,65.672 v1(77.216,66.421) ; v1(77.222,52.832) 77.226,52.829 77.226,51.946 C27.1@77.229,51.943 ; v1(78.867,54.229) C4.1@78.867,55.105 ; U18.3@83.439,37.172 83.439,37.021 83.617,36.843 C97.1@86.188,36.843 v1(87.122,36.843) ; J2B.8@85.77,44.25 J2B.8@85.77,44.25 v1(87.032,44.248)
  Bottom Layer w0.5: v1(62.77,6.918) 62.77,6.916 64,5.686 J5.6@64,4.186 ; v2(83.75,23.241) 85.639,23.241 J4B.4@85.773,23.375
  other v1: 2.5,2.5 5,2.5 7.5,2.5 10,2.5 12.5,2.5 15,2.5 17.5,2.5 20,2.5 22.5,2.5 25,2.5 27.5,2.5 30,2.5 32.5,2.5 35,2.5 37.5,2.5 40,2.5 52.5,2.5 55,2.5 57.5,2.5 60,2.5 62.5,2.5 65,2.5 75,2.5 77.5,2.5 80,2.5 82.5,2.5 85,2.5 3.75,5 6.25,5 8.75,5 11.25,5 13.75,5 16.25,5 18.75,5 21.25,5 26.25,5 28.75,5 33.75,5 36.25,5 38.75,5 41.25,5 46.25,5 51.25,5 53.75,5 56.25,5 58.75,5 61.25,5 73.75,5 76.25,5 78.75,5 81.25,5 83.75,5 7.5,7.5 10,7.5 12.5,7.5 15,7.5 17.5,7.5 22.5,7.5 25,7.5 30,7.5 32.5,7.5 37.5,7.5 40,7.5 42.5,7.5 45,7.5 50,7.5 52.5,7.5 55,7.5 57.5,7.5 60,7.5 62.5,7.5 65,7.5 75,7.5 77.5,7.5 82.5,7.5 85,7.5 48.006,9.144 48.641,9.779 8.75,10 11.25,10 16.25,10 18.75,10 21.25,10 23.75,10 43.75,10 46.25,10 51.25,10 53.75,10 56.25,10 58.75,10 61.25,10 83.75,10 86.25,10 88.75,10 91.25,10 49.276,10.414 49.911,11.049 50.546,11.684 51.181,12.319 2.5,12.5 5,12.5 7.5,12.5 10,12.5 12.5,12.5 25,12.5 27.5,12.5 30,12.5 40,12.5 52.5,12.5 55,12.5 57.5,12.5 60,12.5 77.5,12.5 82.5,12.5 85,12.5 87.5,12.5 90,12.5 51.816,12.954 39.646,13.008 52.451,13.589 53.086,14.224 39.646,14.74 3.75,15 6.25,15 8.75,15 11.25,15 23.75,15 63.75,15 66.25,15 68.75,15 71.25,15 73.75,15 76.25,15 78.75,15 81.25,15 83.75,15 86.25,15 88.75,15 39.646,16.518 45.974,16.523 2.5,17.5 5,17.5 7.5,17.5 17.5,17.5 25,17.5 30,17.5 32.5,17.5 57.5,17.5 60,17.5 65,17.5 67.5,17.5 70,17.5 75,17.5 77.5,17.5 80,17.5 82.5,17.5 85,17.5 39.646,18.292 45.974,18.326 51.816,18.326 13.75,20 61.25,20 63.75,20 68.75,20 71.25,20 73.75,20 76.25,20 78.75,20 81.25,20 83.75,20 86.25,20 88.75,20 25.669,20.202 25.527,21.146 28.482,21.177 2.5,22.5 5,22.5 7.5,22.5 10,22.5 12.5,22.5 15,22.5 60,22.5 62.5,22.5 70,22.5 75,22.5 77.5,22.5 82.5,22.5 87.5,22.5 90,22.5 30.049,23.373 13.75,25 28.75,25 63.75,25 66.25,25 68.75,25 73.75,25 76.25,25 78.75,25 81.25,25 83.75,25 88.75,25 29.718,25.654 30.068,26.924 2.5,27.5 5,27.5 7.5,27.5 10,27.5 12.5,27.5 15,27.5 25,27.5 27.5,27.5 60,27.5 62.5,27.5 65,27.5 67.5,27.5 75,27.5 77.5,27.5 87.5,27.5 90,27.5 82.5,27.516 42.077,28.348 28.194,28.575 60.205,28.706 13.75,30 16.25,30 26.25,30 63.75,30 68.75,30 71.25,30 73.75,30 78.75,30 81.25,30 83.75,30 86.25,30 29.687,30.063 46.082,30.776 30.607,31.369 46.082,31.538 50.887,32.36 2.5,32.5 5,32.5 7.5,32.5 10,32.5 12.5,32.5 15,32.5 67.5,32.5 70,32.5 82.5,32.5 85,32.5 87.5,32.5 90,32.5 25.982,33.377 24.257,33.782 27.432,34.036 66.25,34.935 13.75,35 73.75,35 76.25,35 78.75,35 83.75,35 88.75,35 74.549,36.322 75.565,36.322 76.581,36.322 77.597,36.322 78.613,36.322 30.035,36.722 67.852,37.061 81.925,37.295 2.5,37.5 5,37.5 7.5,37.5 10,37.5 12.5,37.5 15,37.5 75,37.5 77.5,37.5 85,37.5 87.5,37.5 90,37.5 29.637,37.79 21.396,38.231 81.925,38.311 30.035,38.354 21.326,38.805 81.925,39.327 27.914,39.615 69.148,39.866 70.202,39.873 13.75,40 73.75,40 78.75,40 81.25,40 83.75,40 86.25,40 81.925,40.343 46.526,40.659 81.925,41.359 60.068,41.565 22.884,41.917 25.508,41.975 21.127,42.316 81.925,42.375 2.5,42.5 5,42.5 7.5,42.5 10,42.5 12.5,42.5 15,42.5 75,42.5 90,42.5 81.925,43.391 78.613,44.323 25.489,44.448 23.975,44.704 73.75,45 78.75,45 75.565,45.066 77.279,45.085 68.56,45.179 71.919,45.179 30.112,46.783 2.5,47.5 5,47.5 7.5,47.5 10,47.5 12.5,47.5 15,47.5 50,47.5 60,47.5 90,47.5 66.643,47.641 64.771,48.522 22.479,49.149 64.754,49.612 13.75,50 73.75,50 83.872,51.122 59.824,51.137 66.279,51.45 5,52.5 7.5,52.5 10,52.5 12.5,52.5 15,52.5 17.5,52.5 20,52.5 82.5,52.5 90,52.5 45.061,52.578 83.539,52.758 63.875,53.029 47.229,54.54 13.75,55 63.578,55.002 83.75,55 43.556,56.402 63.321,56.562 62.822,57.318 2.5,57.5 5,57.5 7.5,57.5 10,57.5 12.5,57.5 15,57.5 22.5,57.5 27.5,57.5 65,57.5 85,57.5 90,57.5 75.703,57.692 20.955,58.801 46.641,58.846 63.13,59.291 48.141,59.62 62.679,59.872 22.479,59.945 13.75,60 16.25,60 23.75,60 26.25,60 28.75,60 66.25,60 83.75,60 22.479,61.014 60.379,61.849 62.679,61.849 2.5,62.5 5,62.5 7.5,62.5 10,62.5 12.5,62.5 15,62.5 17.5,62.5 20,62.5 22.5,62.5 27.5,62.5 62.5,62.5 65,62.5 85,62.5 56.892,63.859 55.753,63.919 45.704,64.516 57.772,64.977 16.25,65 18.75,65 21.25,65 23.75,65 26.25,65 28.75,65 61.25,65 63.75,65 66.25,65 47.117,65.06 56.589,65.739 2.5,67.5 5,67.5 7.5,67.5 10,67.5 15,67.5 17.5,67.5 20,67.5 22.5,67.5 27.5,67.5 35,67.5 45,67.5 47.5,67.5 52.5,67.5 57.5,67.5 60,67.5 62.5,67.5 65,67.5 67.5,67.5 80,67.5 82.5,67.5 90,67.5 54.265,67.622 55.859,67.631 46.739,69.977 48.133,69.977 13.75,70 16.25,70 18.75,70 21.25,70 23.75,70 26.25,70 28.75,70 36.25,70 43.75,70 48.75,70 51.25,70 53.75,70 56.25,70 58.75,70 61.25,70 63.75,70 66.25,70 76.25,70 83.75,70 7.5,72.5 10,72.5 12.5,72.5 15,72.5 17.5,72.5 20,72.5 22.5,72.5 25,72.5 27.5,72.5 35,72.5 42.5,72.5 80,72.5 82.5,72.5 90,72.5 13.75,75 43.75,75 71.25,75 76.25,75 78.75,75 83.75,75 26.063,76.356 2.5,77.5 5,77.5 7.5,77.5 10,77.5 12.5,77.5 15,77.5 45,77.5 55,77.5 57.5,77.5 60,77.5 82.5,77.5 85,77.5 90,77.5 6.25,80 8.75,80 11.25,80 13.75,80 66.25,80 68.75,80 73.75,80 76.25,80 83.75,80 91.25,80 79.78,80.56 77.879,80.578 69.774,80.89 71.674,80.881 50.572,81.407 49.81,81.915 50.445,81.915 51.08,81.915 50.318,82.423 50.953,82.423 51.588,82.423 7.5,82.5 10,82.5 12.5,82.5 15,82.5 62.5,82.5 65,82.5 82.5,82.5 6.25,85 8.75,85 11.25,85 13.75,85 2.5,87.5 5,87.5 7.5,87.5 10,87.5 12.5,87.5 15,87.5 62.5,87.5 67.5,87.5 70,87.5 72.5,87.5 75,87.5 77.5,87.5 82.5,87.5 85,87.5
JTCK/SWCLK: J5.4 J5BK.4 U1.B14 | length 64.3
  Top Layer w0.169: U1.B14@49.669,38.339 50.096,38.766 v1(50.096,40.514)
  Top Layer w0.254: J5.4@70,4.186 70,7.389 70.587,7.976 J5BK.4@70.587,9.373
  L4_SIG w0.169: v1(50.096,40.514) 52.807,43.225 v1(70.655,43.225)
  Bottom Layer w0.254: J5BK.4@70.587,9.373 71.822,10.608 71.822,42.075 70.673,43.225 v1(70.655,43.225)
JTDI: J5.2 J5BK.8 U1.A14 | length 63.8
  Top Layer w0.169: v1(49.641,40.954) 49.674,40.921 49.674,39.144 U1.A14@49.669,39.139
  Top Layer w0.254: J5BK.8@65.507,9.373 65.507,7.108 65.971,6.644 65.971,4.215 J5.2@66,4.186
  L4_SIG w0.169: v1(49.641,40.954) 52.77,44.084 v1(68.594,44.084)
  Bottom Layer w0.254: J5BK.8@65.507,9.373 65.507,9.728 66.757,10.979 66.757,13.234 68.028,14.506 68.028,34.671 69.036,35.679 69.036,37.065 68.594,37.507 v1(68.594,44.084)
JTDO/SWO: J5.5 J5BK.2 U1.C6 | length 75.1
  Top Layer w0.169: U1.C6@43.269,37.539 43.269,37.553 43.678,37.962 v1(43.678,37.976)
  Top Layer w0.254: J5.5@72,4.186 72,6.849 73.127,7.976 J5BK.2@73.127,9.373
  L4_SIG w0.169: v1(44.265,40.187) 44.294,40.158 48.032,40.158 52.527,44.653 v1(71.755,44.653)
  Bottom Layer w0.169: v1(43.678,37.976) 44.265,38.563 v1(44.265,40.187)
  Bottom Layer w0.254: v1(71.755,44.653) 72.909,43.499 72.909,14.904 74.603,13.21 74.603,10.849 J5BK.2@73.127,9.373
JTMS/SWDIO: J5.3 J5BK.6 U1.C15 | length 60.6
  Top Layer w0.169: U1.C15@50.469,37.539 v1@50.869,37.939
  Top Layer w0.254: J5.3@68,4.186 68,9.326 J5BK.6@68.047,9.373
  L4_SIG w0.169: v1(51.742,40.331) 53.341,41.93 59.279,41.93 59.528,42.18 60.721,42.18 61.115,41.786 v1(69.734,41.786)
  Bottom Layer w0.169: v1(50.887,37.939) 51.278,38.33 51.278,39.041 51.742,39.504 v1(51.742,40.331)
  Bottom Layer w0.254: J5BK.6@68.047,9.373 68.047,9.513 69.439,10.906 69.439,34.661 69.734,34.956 v1(69.734,41.786)
LED1: LED1.2 U1.U2 | length 28.7
  Top Layer w0.152: LED1.2@27.643,3.67 27.669,3.697 28.591,3.697 v1(28.618,3.723) ; v1(39.553,25.232) 40.069,25.748 U1.U2@40.069,26.339
  L4_SIG w0.152: v1(28.618,3.723) 29.123,3.723 29.639,4.239 29.639,5.382 37.948,13.691 37.948,22.194 39.553,23.8 v1(39.553,25.232)
LED2: LED2.2 U1.U3 | length 27.2
  Top Layer w0.152: LED2.2@31.241,3.67 31.247,3.677 32.252,3.677 v1(32.258,3.683) ; v1(40.869,25.232) U1.U3@40.869,26.339
  L4_SIG w0.152: v1(32.258,3.683) 32.924,4.349 32.924,7.005 40.869,14.95 v1(40.869,25.232)
LVDS_RxC_N: J3.9 J3B.1 | length 2.9
  Top Layer w0.254: v1(67,81.098) J3.9@67,81.958
  Bottom Layer w0.254: v1@67.002,81.122 67.727,81.847 67.727,82.5 J3B.1@68,82.773
LVDS_RxC_P: J3.8 J3B.2 | length 2.8
  Top Layer w0.254: v1(68.5,81.098) J3.8@68.5,81.958
  Bottom Layer w0.254: v1(68.5,81.098) 69.143,81.741 69.143,82.666 J3B.2@69.25,82.773
LVDS_RxD_N: J3.4 J3B.6 | length 2.6
  Top Layer w0.254: v1(74.5,81.098) J3.4@74.5,81.958
  Bottom Layer w0.254: J3B.6@74.25,82.773 74.25,81.374 74.5,81.124 v1(74.5,81.098)
LVDS_RxD_P: J3.3 J3B.7 | length 2.7
  Top Layer w0.254: v1(76,81.098) J3.3@76,81.958
  Bottom Layer w0.254: J3B.7@75.5,82.773 75.5,81.598 v1(76,81.098)
LVDS_SPI_MOSI: U1.C11 U6.5 | length 62.6
  Top Layer w0.169: v1(47.048,40.747) 47.048,40.402 46.75,40.103 46.405,40.103 46.072,39.77 46.072,38.139 46.273,37.938 46.668,37.938 47.029,37.577 47.231,37.577 U1.C11@47.269,37.539
  L4_SIG w0.169: v1(47.048,40.747) 47.052,40.75 47.807,40.75 59.072,52.015 59.072,68.628 63.977,73.533 78.281,73.533 v1(80.097,75.349)
  Bottom Layer w0.169: U6.5@80.082,76.177 80.097,76.162 v1(80.097,75.349)
LVDS_SPI_SCK: U1.B9 U7.5 | length 58.8
  Top Layer w0.169: U1.B9@45.669,38.339 45.669,38.366 45.269,38.766 45.269,39.679 45.671,40.081 45.671,40.68 46.124,41.133 v1(46.723,41.133)
  L4_SIG w0.169: v1(46.723,41.133) 47.622,41.133 58.674,52.185 58.674,52.705 58.674,52.79 58.235,53.229 58.235,53.483 58.801,54.049 58.801,54.303 58.235,54.869 58.235,55.123 58.801,55.689 58.801,55.943 58.235,56.509 58.235,56.763 58.801,57.329 58.801,57.583 58.235,58.149 58.235,58.403 58.801,58.969 58.801,59.223 58.235,59.789 58.235,60.043 58.801,60.609 58.801,60.863 58.235,61.429 58.235,61.683 58.801,62.249 58.801,62.503 58.235,63.069 58.235,63.323 58.801,63.889 58.801,64.143 58.235,64.71 58.235,64.964 58.801,65.53 58.801,65.784 58.235,66.35 58.235,66.604 58.801,67.17 58.801,67.424 58.674,67.551 58.674,67.818 58.674,68.834 63.775,73.935 71.501,73.935 72.096,74.53 v1(72.096,75.349)
  Bottom Layer w0.169: U7.5@71.954,76.177 72.096,76.035 v1(72.096,75.349)
LVDS_TxC_N: J3.7 J3B.3 R93.1 U7.3 | length 8.4
  Top Layer w0.141: J3.7@70,81.958 70,81.767 70.26,81.508 70.499,81.508 70.581,81.425 70.581,81.077 70.473,80.969 v1(70.473,80.899)
  Bottom Layer w0.141: U7.3@69.444,78.077 70.482,78.077 70.565,78.16 70.565,79.584 70.482,79.667 ; R93.1@69.924,79.667 70.482,79.667 ; J3B.3@70.5,82.773 70.5,82.373 70.829,82.044 70.908,82.044 70.991,81.961 70.991,81.783 70.565,81.357 70.565,81.047 70.473,80.955 v1(70.473,80.899) 70.473,80.843 70.565,80.751 70.565,79.75 70.482,79.667
LVDS_TxC_P: J3.6 J3B.4 R93.2 U7.4 | length 8.1
  Top Layer w0.141: v1(70.975,80.89) 70.975,80.96 70.85,81.085 70.85,81.425 70.932,81.508 71.24,81.508 71.5,81.767 J3.6@71.5,81.958
  Bottom Layer w0.141: v1@70.833,80.751 70.833,79.75 70.916,79.667 ; 70.833,81.047 70.833,81.246 71.259,81.672 71.259,81.961 71.342,82.044 71.421,82.044 71.75,82.373 J3B.4@71.75,82.773 ; R93.2@71.474,79.667 70.916,79.667 ; U7.4@71.954,78.077 70.916,78.077 70.833,78.16 70.833,79.584 70.916,79.667
LVDS_TxD_N: J3.2 J3B.8 R92.1 U6.3 | length 9.4
  Top Layer w0.141: J3.2@77.5,81.958 77.5,81.767 77.76,81.508 78.033,81.508 78.116,81.425 78.116,81.197 78.371,80.941 78.486,80.941 78.568,80.859 78.568,80.58 v1(78.579,80.569)
  Bottom Layer w0.141: J3B.8@76.75,82.773 76.75,82.373 77.079,82.044 77.158,82.044 77.241,81.961 77.241,81.709 77.699,81.251 78.359,81.251 78.558,81.052 78.558,80.59 v1(78.579,80.569) ; U6.3@77.572,78.077 78.61,78.077 78.693,78.16 78.693,79.584 78.61,79.667 ; R92.1@78.052,79.667 78.61,79.667 ; 78.693,80.37 78.693,79.75 78.61,79.667
LVDS_TxD_P: J3.1 J3B.9 R92.2 U6.4 | length 9.5
  Top Layer w0.141: J3.1@79,81.958 79,81.767 78.74,81.508 78.467,81.508 78.384,81.425 78.384,81.308 78.483,81.21 78.597,81.21 78.837,80.97 78.837,80.883 79.08,80.639 v1(79.08,80.569)
  Bottom Layer w0.141: J3B.9@78,82.773 78,82.373 77.671,82.044 77.592,82.044 77.509,81.961 77.509,81.82 77.81,81.519 78.47,81.519 78.995,80.995 v1@78.995,80.666 ; 78.961,80.37 78.961,79.75 79.044,79.667 ; R92.2@79.602,79.667 79.044,79.667 ; U6.4@80.082,78.077 79.044,78.077 78.961,78.16 78.961,79.584 79.044,79.667
MCU_VCAP: C46.2 C86.2 C87.2 U1.A7 U1.D17 U1.U11 | length 11
  Top Layer w0.152: U1.U11@47.269,26.339 47.269,25.332 48.343,24.258 C46.2@48.343,23.393 v1(48.343,22.987)
  Top Layer w0.254: v1(43.795,41.512) 43.795,39.435 44.069,39.161 U1.A7@44.069,39.139 ; v1@43.799,41.516 C87.2@43.799,42.389 ; U1.D17@52.069,36.739 52.074,36.739 52.446,37.11 v1(52.451,37.11) ; v1@52.477,37.084 52.84,36.721 55.595,36.721 C86.2@55.613,36.703
MRAM_CLK: R98.2 U1.L3 | length 52.3
  Top Layer w0.152: U1.L3@40.869,31.139 40.887,31.139 41.244,31.496 v1(41.262,31.496)
  Top Layer w0.169: R98.2@18.654,38.153 18.654,39.521 19.247,40.114 21.61,40.114 21.937,39.786 21.937,38.815 v1(21.945,38.807)
  L4_SIG w0.152: v1(21.945,38.807) 21.945,32.933 21.945,32.493 22.156,32.282 22.156,32.028 21.644,31.516 21.644,31.262 22.156,30.75 22.156,30.496 21.644,29.984 21.644,29.73 22.156,29.218 22.156,28.964 21.644,28.452 21.644,28.198 22.156,27.686 22.156,27.432 21.644,26.92 21.644,26.666 21.945,26.365 21.945,26.289 21.945,25.95 27.459,20.437 33.356,20.437 34.074,21.154 34.074,23.587 37.067,26.581 37.067,31.268 38.367,32.568 39.528,32.568 40.092,32.004 40.754,32.004 v1(41.262,31.496)
MRAM_CS: R94.1 U1.G15 | length 49.2
  Top Layer w0.152: v1(50.076,34) 50.103,34 50.442,34.339 U1.G15@50.469,34.339
  Top Layer w0.169: R94.1@15.86,22.379 15.86,20.704 17.285,19.279 27.429,19.279 28.273,20.123 28.273,20.131 29.273,21.13 v1(29.273,21.177)
  L4_SIG w0.152: v1(29.273,21.177) 29.296,21.154 33.142,21.154 33.419,21.431 33.419,24.002 36.33,26.913 36.33,31.518 38.349,33.537 42.627,33.537 42.98,33.89 42.98,34.765 43.346,35.131 46.383,35.131 47.978,33.536 49.613,33.536 v1(50.076,34)
MRAM_IO0: R99.2 U1.K4 | length 49.9
  Top Layer w0.152: v1(41.261,32.328) 41.27,32.328 41.66,31.939 U1.K4@41.669,31.939
  Top Layer w0.169: R99.2@20.064,38.153 20.064,39.153 20.379,39.468 v1(21.326,39.468)
  L4_SIG w0.152: v1(21.326,39.468) 22.031,39.468 22.41,39.089 22.41,26.009 22.499,25.919 22.553,25.866 22.696,25.866 22.976,26.145 23.119,26.145 23.263,26.001 23.263,25.858 22.901,25.496 22.901,25.353 23.045,25.209 23.188,25.209 23.475,25.495 23.618,25.495 23.762,25.352 23.762,25.208 23.558,25.004 23.558,24.861 25.993,22.425 27.666,20.752 33.186,20.752 33.749,21.314 33.749,23.815 36.725,26.791 36.725,31.434 38.442,33.151 40.406,33.151 41.229,32.328 v1(41.261,32.328)